# EAGLE board OHS (EAGLE 9.1.2)
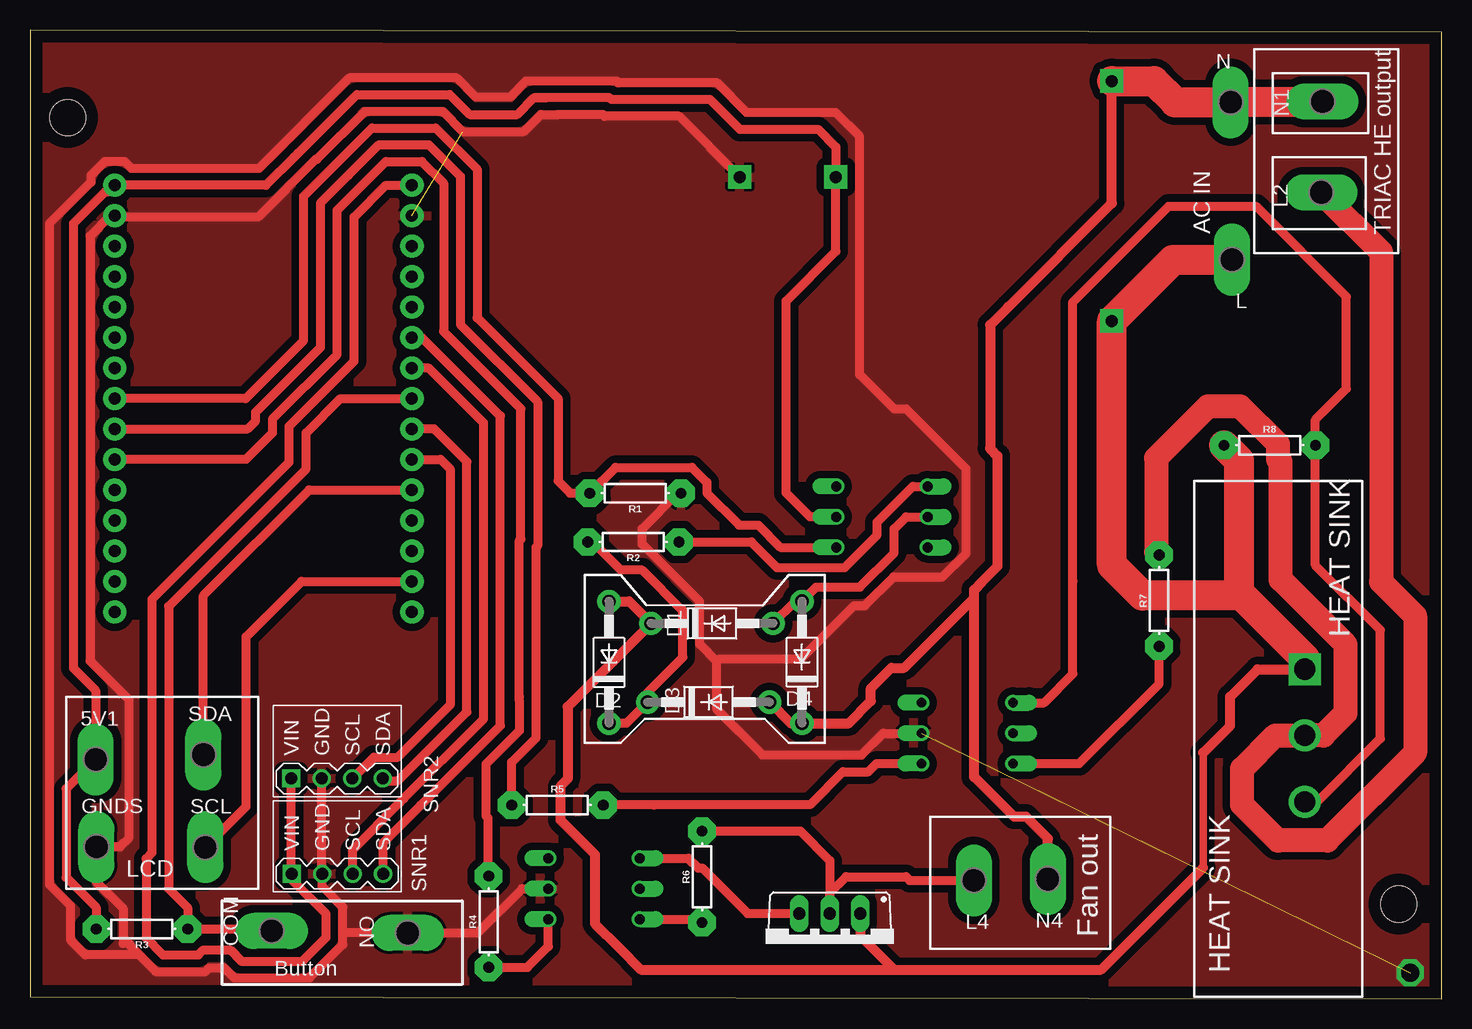
[diagram p0: board, top side]
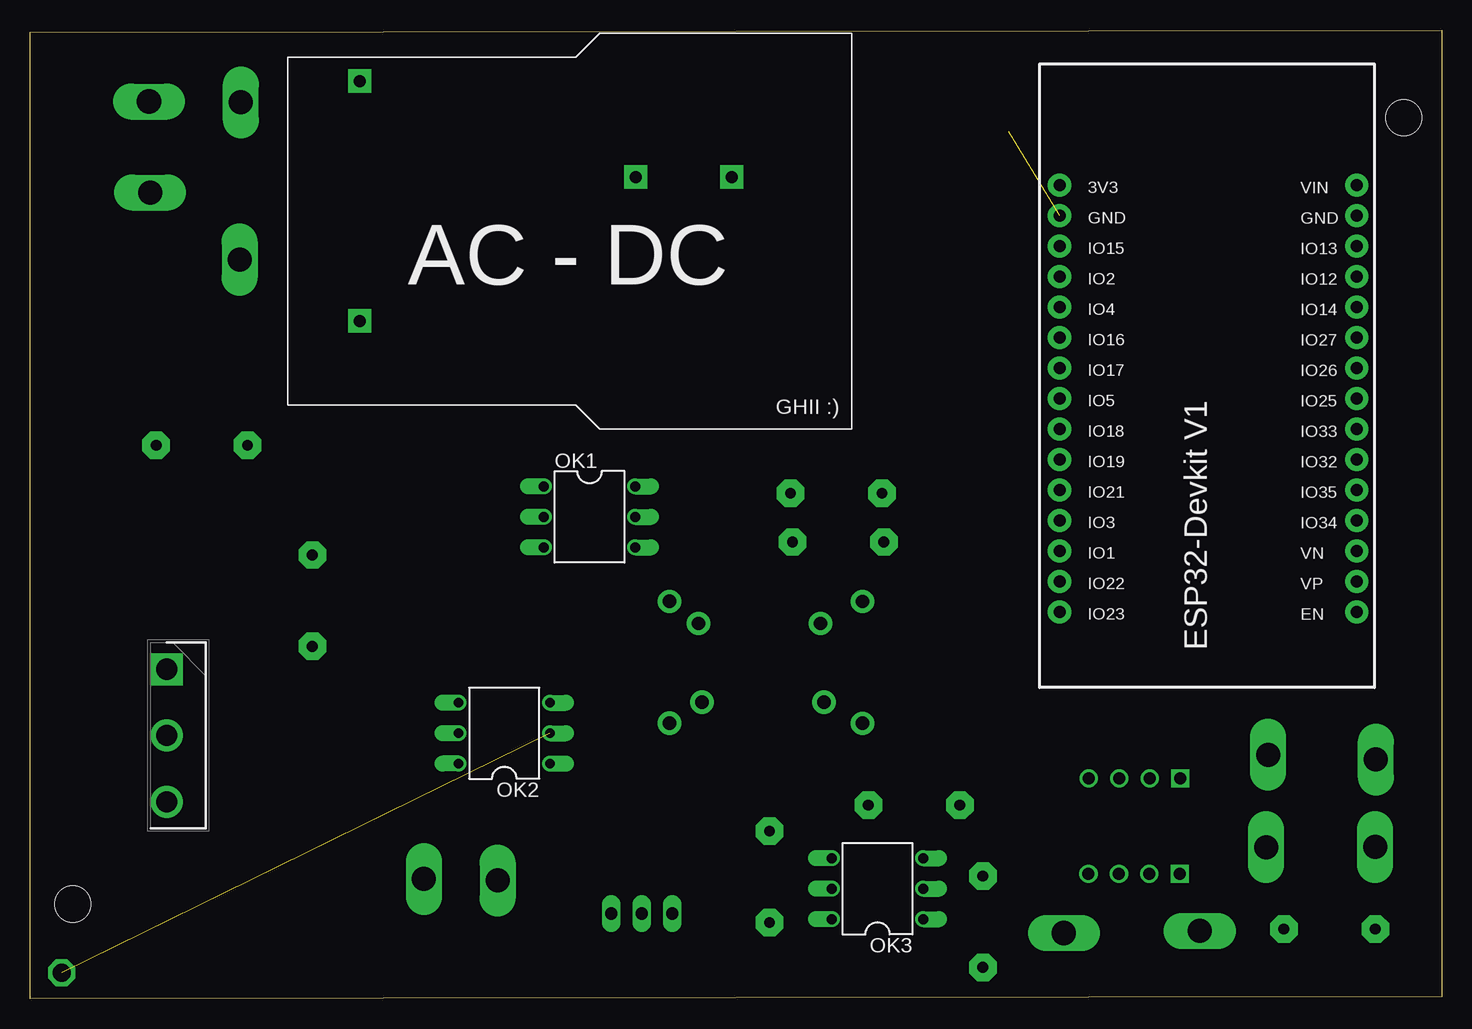
[diagram p1: board, bottom side, seen from below]

Size 117.63 x 80.79 mm. Coordinates in mm from the lower left corner, seen from the top.
Outline: 0,0.19 117.63,0 117.63,80.6 0,80.79 0,0.19
Copper layers (1*16): Top 0.035mm / dielectric 1.5mm / Bottom 0.035mm
Design rules "default": minimum track width 6mil, minimum drill 0.35mm, track to track 6mil, track to pad 6mil, pad to pad 6mil, via to via 6mil, smd to smd 6mil, copper to edge 40mil, drill to drill 6mil, minimum pad ring 10mil, minimum via ring 8mil, stop-mask expansion 4mil, vias tented up to drill 0mil, thermal gap 10mil
Net classes: 0 default: width 0.762 mm, drill 0.762 mm, clearance 0.635 mm; 1 ESCOM: width 2.5 mm, drill 2.5 mm, clearance 0.991 mm; 2 ESCOM mid: width 2 mm, drill 2 mm, clearance 0.889 mm
Holes 3 mm at 3.14,73.48 114.07,7.92

## Footprints (pad centres in the part's own frame; a part is rotated, then mirrored left to right if it is on the bottom)
P1-20Y = drill 2.007 pad 2.54 long: TP 0,0
DO41-10 = drill 1.118 pad 1.93: A 5.08,0; C -5.08,0
DIL06 = drill 0.813 offset: 1 -2.54,-3.81; 2 0,-3.81; 3 2.54,-3.81; 4 2.54,3.81; 5 0,3.81; 6 -2.54,3.81
AXIAL-0.3 = drill 0.9 pad 2.286 octagon: P$1 -3.81,0; P$2 3.81,0
TEMP-HUM-SENSOR-HTU21D = drill 1 square: 1 -5.08,3.81 | drill 1: 2 -5.08,1.27; 3 -5.08,-1.27; 4 -5.08,-3.81
TO220BV = drill 1.016 long: G 2.54,-2.54; T1 -2.54,-2.54; T2 0,-2.54
TO552P460X1530X2985-3P = drill 1.77 pad 2.655 square: 1 0,0 | drill 1.77 pad 2.655: 2 5.525,0; 3 11.05,0
HT-71-1 = drill 1 pad 1.93 square: 1 -8,-10; 2 -8,10; 3 15,2; 4 23,2
ESP32-DEVKITV1 = drill 1 pad 1.93: 1 -22.87,-13.54; 2 -20.33,-13.54; 3 -17.79,-13.54; 4 -15.25,-13.54; 5 -12.71,-13.54; 6 -10.17,-13.54; 7 -7.63,-13.54; 8 -5.09,-13.54; 9 -2.55,-13.54; 10 -0.01,-13.54; 11 2.53,-13.54; 12 5.07,-13.54; 13 7.61,-13.54; 14 10.15,-13.54; 15 12.69,-13.54; 16 12.69,11.23; 17 10.15,11.23; 18 7.61,11.23; 19 5.07,11.23; 20 2.53,11.23; 21 -0.01,11.23; 22 -2.55,11.23; 23 -5.09,11.23; 24 -7.63,11.23; 25 -10.17,11.23; 26 -12.71,11.23; 27 -15.25,11.23; 28 -17.79,11.23; 29 -20.33,11.23; 30 -22.87,11.23

## Placement (x,y rotation side)
5V1  TPPAD1-20Y  [P1-20Y]  5.47,19.97 0 top
COM  TPPAD1-20Y  [P1-20Y]  20.15,5.68 90 top
D1  1N4004  [DO41-10]  56.83,31.31 0 top
D2  1N4004  [DO41-10]  48.25,28.07 90 top
D3  1N4004  [DO41-10]  56.55,24.75 0 top
D4  1N4004  [DO41-10]  64.33,28.07 90 top
GNDS  TPPAD1-20Y  [P1-20Y]  5.54,12.68 0 top
L  TPPAD1-20Y  [P1-20Y]  100.16,61.64 180 top
L2  TPPAD1-20Y  [P1-20Y]  107.62,67.24 90 top
L4  TPPAD1-20Y  [P1-20Y]  78.65,9.89 180 top
N  TPPAD1-20Y  [P1-20Y]  100.06,74.76 0 top
N1  TPPAD1-20Y  [P1-20Y]  107.71,74.83 90 top
N4  TPPAD1-20Y  [P1-20Y]  84.81,10 180 top
NO  TPPAD1-20Y  [P1-20Y]  31.47,5.5 90 top
OK1  4N35  [DIL06]  71,40.19 270 bottom
OK2  MOC3020M  [DIL06]  78.11,22.16 90 bottom
OK3  MOC3020M  [DIL06]  47,9.19 90 bottom
R1  4k7  [AXIAL-0.3]  50.44,42.17 180 top
R2  50K  [AXIAL-0.3]  50.28,38.1 180 top
R3  10k  [AXIAL-0.3]  9.33,5.83 180 top
R4  220Ω  [AXIAL-0.3]  38.22,6.44 90 top
R5  220Ω  [AXIAL-0.3]  43.95,16.17 0 top
R6  1k  [AXIAL-0.3]  56,10.19 90 top
R7  320Ω  [AXIAL-0.3]  94.09,33.21 90 top
R8  320Ω  [AXIAL-0.3]  103.31,46.17 0 top
SCL  TPPAD1-20Y  [P1-20Y]  14.62,12.65 0 top
SDA  TPPAD1-20Y  [P1-20Y]  14.45,20.37 0 top
SNR1  TEMP-HUM-SENSOR-HTU21D  [TEMP-HUM-SENSOR-HTU21D]  25.61,15.52 90 top
SNR2  TEMP-HUM-SENSOR-HTU21D  [TEMP-HUM-SENSOR-HTU21D]  25.58,23.46 90 top
T2  BT137  [TO220BV]  66.65,4.59 180 top
U1  BTA41-600BRG  [TO552P460X1530X2985-3P]  106.23,27.49 270 bottom
U$1  AD-DC-240-5  [HT-71-1]  82.15,66.53 0 bottom
U$6  ESP32DEVKITV1  [ESP32-DEVKITV1]  18.29,44.97 270 bottom

## Library data of the parts
5V1 COM GNDS L L2 L4 N N1 N4 NO SCL SDA = testpad
D1-D4 = adafruit
OK1 = optocoupler; MF: FAIRCHILD SEMICONDUCTOR; MPN: 4N35; OC_FARNELL: 1328375; OC_NEWARK: 72K9946
OK2 OK3 = optocoupler; MF: FAIRCHILD SEMICONDUCTOR; MPN: MOC3020-M; OC_FARNELL: 1505425; OC_NEWARK: 72K8895
R1-R3 = SparkFun-Resistors; PROD_ID: RES-09435
R4-R8 = SparkFun-Resistors; PROD_ID: RES-08380
SNR1 SNR2 = GHIdiy-modules
T2 = triac
U1 = BTA41-600BRG; ALLIED_NUMBER: 70332160; ALLIED_PRICE-STOCK: http://www.alliedelec.com/stmicroelectronics-bta41-600brg/70332160/; DESCRIPTION: TRIAC BTA41-600BRG, 600V, Gate Trigger 1.3V 100mA, TOP Insulated 3-Pin; HEIGHT: 4.6mm; MANUFACTURER_NAME: STMicroelectronics; MANUFACTURER_PART_NUMBER: BTA41-600BRG; MOUSER_PART_NUMBER: 511-BTA41-600B; MOUSER_PRICE-STOCK: https://www.mouser.co.uk/ProductDetail/STMicroelectronics/BTA41-600BRG?qs=CkbNAJEAr%2FQw0ISg%252BSlP2w%3D%3D; RS_PART_NUMBER: 6871007P; RS_PRICE-STOCK: http://uk.rs-online.com/web/p/products/6871007P
U$1 = GHII Samsung AC DC
U$6 = ESP32-DEVKITV1Correct

## Nets
GND: GNDS.TP NO.TP OK2.2 OK3.2 R1.P$1 SNR1.2 SNR2.2 U$1.4 U$6.2 U$6.29
N$1: OK3.6 R6.P$1
N$2: SNR2.3 U$6.10
N$3: SNR2.4 U$6.9
N$4: SNR1.3 U$6.7
N$5: OK2.6 R7.P$1
N$6 [ESCOM]: D3.A D4.C N1.TP N4.TP N.TP U$1.2
N$7 [ESCOM]: D1.C D2.A L.TP R8.P$1 T2.T1 U1.1 U$1.1
N$8: D2.C D3.C R2.P$2
N$9: SNR1.4 U$6.6
N$10: L4.TP R6.P$2 T2.T2
N$11: D1.A D4.A OK1.2
N$12: SNR1.1 SNR2.1 U$6.1
N$13: OK1.1 R2.P$1
N$14: OK3.4 T2.G
N$15 [ESCOM mid]: OK2.4 R8.P$2 U1.3
N$16: OK1.4 R1.P$2 U$6.23
N$17: COM.TP R3.P$1 U$6.8
N$18: L2.TP R7.P$2 U1.2
N$19: SDA.TP U$6.11
N$20: R5.P$1 U$6.22
N$21: R4.P$2 U$6.21
N$22: SCL.TP U$6.14
N$23: OK2.1 R5.P$2
N$24: OK3.1 R4.P$1
VCC: 5V1.TP OK1.5 R3.P$2 U$1.3 U$6.30

## Tracks (layer width: path | path; a pad name or v marks a point on that pad's centre or on a via)
GND  (via drill 1.5 pad 1.1)  (2 unrouted)
  Top 0.762: 7.76,5.08 7.76,7.55 5.54,9.77 GNDS.TP 7.49,12.68 8.22,13.41 8.22,24.97 5,28.19 5,63.62 6.69,65.3 U$6.29 7.17,65.19 19,65.19 23.81,70 23.91,70 27.92,74.01 34.39,74.01 36.07,72.33 41.17,72.33 42.56,73.73 44,73.73 47.73,73.73 47.87,73.59 54.1,73.59 U$1.4 | 7.76,5.08 7.76,4.64 | SNR2.2 24.31,10.47 SNR1.2 24.34,9.39 26.07,7.66 26.07,5.48 | 7.76,5.08 8.27,4.57 8.27,4.5 10.29,2.48 | 10.29,2.48 10.5,2.28 14.61,2.28 14.93,2.6 16.18,2.6 17.02,1.76 23.28,1.76 26.07,4.55 26.07,5.48 | 26.07,5.48 26.09,5.5 NO.TP 37.31,5.5 41,9.19 OK3.2 | 10.29,2.48 9.1,3.68 4.62,3.68 3.36,4.94 3.36,7.81 1.62,9.55 1.62,64.64 5.08,68.1 5.08,68.66 6.24,69.82 7.88,69.82 8.46,69.24 19.05,69.24 26.62,76.81 35.54,76.81 37.16,75.19 40,75.19 41.33,76.52 48.88,76.52 49.02,76.38 57.26,76.38 59.73,73.91 67.14,73.91 69.14,71.92 69.14,52.05 72,49.19 73,49.19 78,44.19 78,37.15 76.04,35.19 71.98,35.19 69.58,32.79 68.7,32.79 64.25,28.34 57.45,28.34 57.25,28.13 | 67,20.34 61.05,20.34 57.25,24.13 57.25,28.13 | 67,20.34 69.28,20.34 | 57.25,28.13 55.8,29.58 55.8,33.14 51,37.93 51,39.19 53.98,42.17 R1.P$1 | 67,20.34 69.28,20.34 | OK2.2 71.11,22.16 69.28,20.34
  other vias: 115,2.19
  pour Top: -5,-0.81 -5,84.19 121,84.19 121,-2.81 -5,-2.81
N$1
  Top 0.762: OK3.6 55.73,6.65 R6.P$1
N$2
  Top 0.762: SNR2.3 26.89,18.38 28.66,20.15 30.64,20.15 35,24.51 35,44.19 34.21,44.98 U$6.10
N$3
  Top 0.762: SNR2.4 29.58,18.19 30.65,18.19 36.4,23.93 36.4,44.79 33.67,47.52 U$6.9
N$4
  Top 0.762: 30.82,16.37 26.88,12.44 SNR1.3 | 30.82,16.37 31.16,16.72 | 30.82,16.37 37.79,23.35 37.79,48.04 33.23,52.6 U$6.7
N$5
  Top 0.762: OK2.6 87.43,19.62 94.09,26.28 R7.P$1
N$6
  Top 0.813: D3.A 63.38,23 D4.C 68.23,23 70.07,24.84 70.07,25.9 71.77,27.6 72.84,27.6 78.67,33.44 78.67,34.12 | U$1.2 90.16,66.34 81.5,57.69 80,56.19 80,45.9 80.62,45.28 80.62,36.06 79.38,34.81 78.67,34.12 | N4.TP 84.81,13.38 83,15.19 82,15.19 78.67,18.51 78.67,34.12
  Top 2.5: N1.TP 100.13,74.83 N.TP 95.43,74.76 93.66,76.53 U$1.2
N$7
  Top 0.61: 97.76,10.95 97.76,20.53
  Top 0.813: D2.A 49.92,33.15 D1.C 44.81,24.37 44.81,18.33 44.2,17.73 44.2,14.92 47.07,12.06 47.07,6.29 49.08,4.27 50.9,2.46 72,2.46 | 97.76,20.53 100,22.77 100,25.19 102.3,27.49 U1.1 | 97.76,10.95 89.27,2.46 72,2.46 | T2.T1 69.19,5.26 72,2.46
  Top 2.5: L.TP 95.26,61.64 U$1.1 90.16,36.17 92.69,33.64 100.97,33.64 | U1.1 106.23,28.38 100.97,33.64 | R8.P$1 100.76,44.91 100.76,33.85 100.97,33.64 | 100.97,33.64 101.21,33.4 100.97,33.64 | R8.P$1
N$8
  Top 0.762: D2.C 49.7,22.99 D3.C 51.47,25.56 54.4,28.49 54.4,32.41 54.36,32.41 51.01,35.77 49.25,35.77 46.91,38.1 R2.P$2
N$9
  Top 0.762: SNR1.4 29.42,13 32.3,15.89 | 32.3,15.89 32.56,16.14 | U$6.6 32.67,55.14 39.19,48.61 39.19,22.77 32.3,15.89
N$10
  Top 0.762: 66.65,8.29 66.57,8.21 | T2.T2 66.65,8.29 | 66.65,8.29 | 66.65,8.29 66.65,8.84 68,10.19 73,10.19 73.3,9.89 L4.TP | R6.P$2 64.19,14 66.65,11.54 66.65,8.29 | 66.65,8.29 66.57,8.21 | 66.57,8.21 66.57,7.13 | T2.T2 66.65,8.29 | 66.65,8.29 | T2.T2 66.65,8.29
N$11
  Top 0.762: D1.A 63.76,33.16 D4.A 65.51,34.34 69.15,34.34 72,37.19 72,39.19 73,40.19 OK1.2
N$12
  Top 0.762: SNR2.1 21.77,10.47 SNR1.1 21.8,9.95 24.67,7.08 24.67,5.12 22.7,3.15 17.6,3.15 16.67,4.08 14.44,4.08 14.03,3.68 11.08,3.68 9.67,5.08 9.67,11.71 10.15,12.19 10.15,33.32 21.6,44.77 21.6,47.77 27,53.17 27,65.19 29.65,67.84 U$6.1
N$13
  Top 0.762: R2.P$1 60.11,38.1 62.24,35.97 67.88,35.97 70.6,38.69 70.6,39.77 73.56,42.73 OK1.1
N$14
  Top 0.762: OK3.4 54.86,11.73 55.67,10.92 56,10.92 59.79,7.13 T2.G
N$15
  Top 0.762: U1.3 107.25,16.44 112.53,21.72 112.53,30.75 107.12,36.16 R8.P$2 107.12,48.31 109.7,50.89 109.7,58.56 102.17,66.08 94.89,66.08 86.91,58.1 86.91,34.83 86.91,27.1 84.51,24.7 OK2.4
N$16
  Top 0.762: U$6.23 17.97,50.06 22.81,54.9 22.81,66.93 28.5,72.61 33.81,72.61 37.26,69.17 37.26,56.81 44,50.07 44,43.19 45.02,42.17 R1.P$2 | OK1.4 62.54,37.65 60.69,39.5 59.1,39.5 56.41,42.19 56.41,43.07 55.15,44.33 48.79,44.33 R1.P$2 | R1.P$2 46.91,41.9
N$17
  Top 0.762: U$6.8 25.87,50.06 23,47.19 23,44.19 11.55,32.74 11.55,9.2 13.14,7.61 R3.P$1 | 13.53,5.45 R3.P$1 | R3.P$1 19.99,5.83 COM.TP
N$18
  Top 2: L2.TP 112.59,62.27 112.59,34.78 115.42,31.95 115.42,20.52 108.12,13.22 104.03,13.22 104,13.19 101,16.19 101,19.19 103.78,21.97 U1.2 107.78,21.97 109.64,23.83 109.64,29.55 104.23,34.97 104.23,44.77 104,45 104,46.25 100.84,49.41 98.16,49.41 93.84,45.1 93.84,37.27 R7.P$2
N$19
  Top 0.762: SDA.TP 14.45,33.64 23.25,42.44 U$6.11
N$20
  Top 0.762: 26.6,68.74 26.52,68.67 | 26.52,68.67 24.21,66.35 24.21,54.32 18.81,48.93 18.81,48.19 18.14,47.52 U$6.22 | 42.17,25.43 42.17,26.19 | 42.17,26.19 42.17,37.65 42.29,37.77 42.29,49.8 35.86,56.23 35.86,68.59 33.23,71.22 29.08,71.22 26.52,68.67 | 40.58,16.61 R5.P$1 40.14,19.75 42.17,21.78 42.17,26.19 | 42.17,26.19
N$21
  Top 0.762: 34.45,55.67 34.46,55.65 | 34.46,55.65 40.9,49.22 40.9,38.35 40.78,38.23 40.78,25.19 40.78,24.85 40.78,22.36 37.98,19.56 37.98,15.28 38.16,15.1 38.16,10.19 R4.P$2 | U$6.21 18,44.98 20.21,47.19 20.21,48.35 25.6,53.74 25.6,65.77 29.66,69.82 32.65,69.82 34.46,68.01 34.46,55.65
N$22
  Top 0.762: SCL.TP 18,16.04 18,30.19 22.63,34.82 U$6.14
N$23
  Top 0.762: R5.P$2 51.98,16.17 52,16.19 65,16.19 67.75,18.94 69.86,18.94 70.54,19.62 OK2.1
N$24
  Top 0.762: R4.P$1 41.44,2.63 43.19,4.38 OK3.1
VCC
  Top 0.762: R3.P$2 5.52,7.63 3.02,10.13 3.02,17.52 5V1.TP 5.47,25.72 3.61,27.58 3.61,64.65 6.24,67.28 6.5,67.28 U$6.30 19.65,67.84 22,70.19 | 43,75.12 48.3,75.12 48.45,74.98 56.68,74.98 59.15,72.52 65.67,72.52 67.16,71.03 U$1.3 67.16,62.34 63,58.19 63,42.19 65,40.19 OK1.5 | 43,75.12 42.04,75.12 | 22.41,70.6 22,70.19 | 22,70.19 22.02,70.19 27.24,75.41 34.97,75.41 36.65,73.73 40.59,73.73 41.98,75.12 43,75.12

## Text on the board
tNames: AC IN | TRIAC HE output | HEAT SINK | LCD | Fan out | Button | HEAT SINK